# Allegro board A527-REF-DDR4-16X2-S4L-V2-0.brd
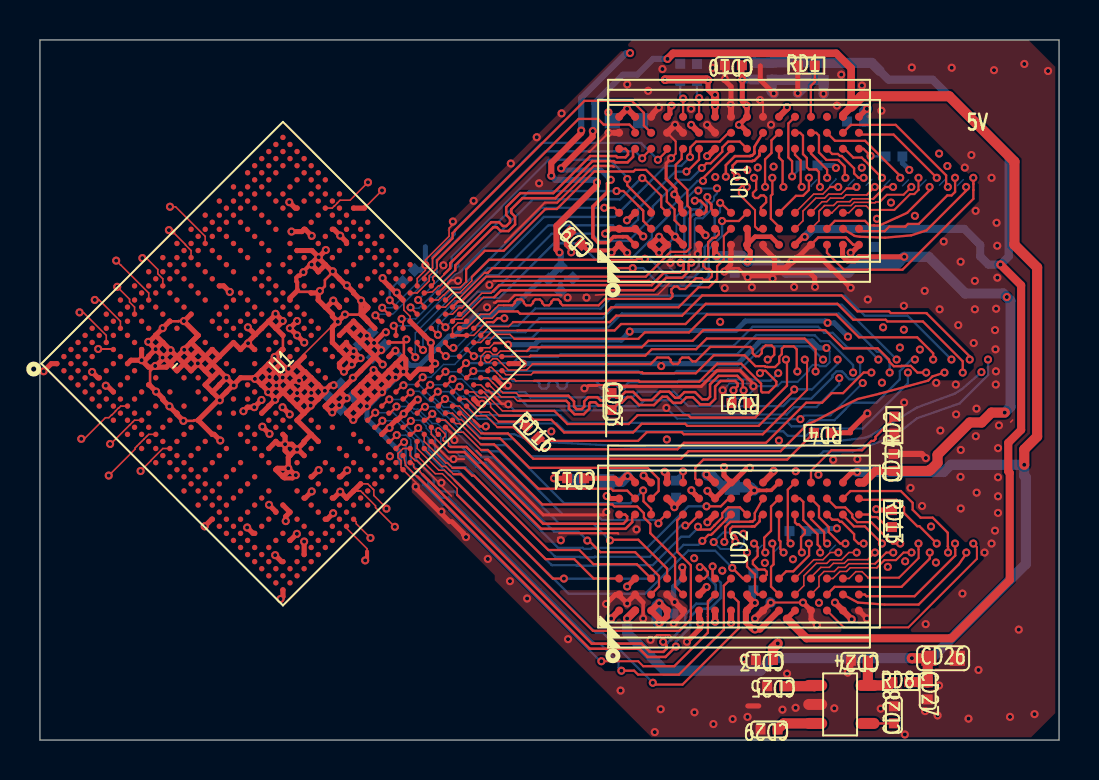
[diagram p0: board, top side]
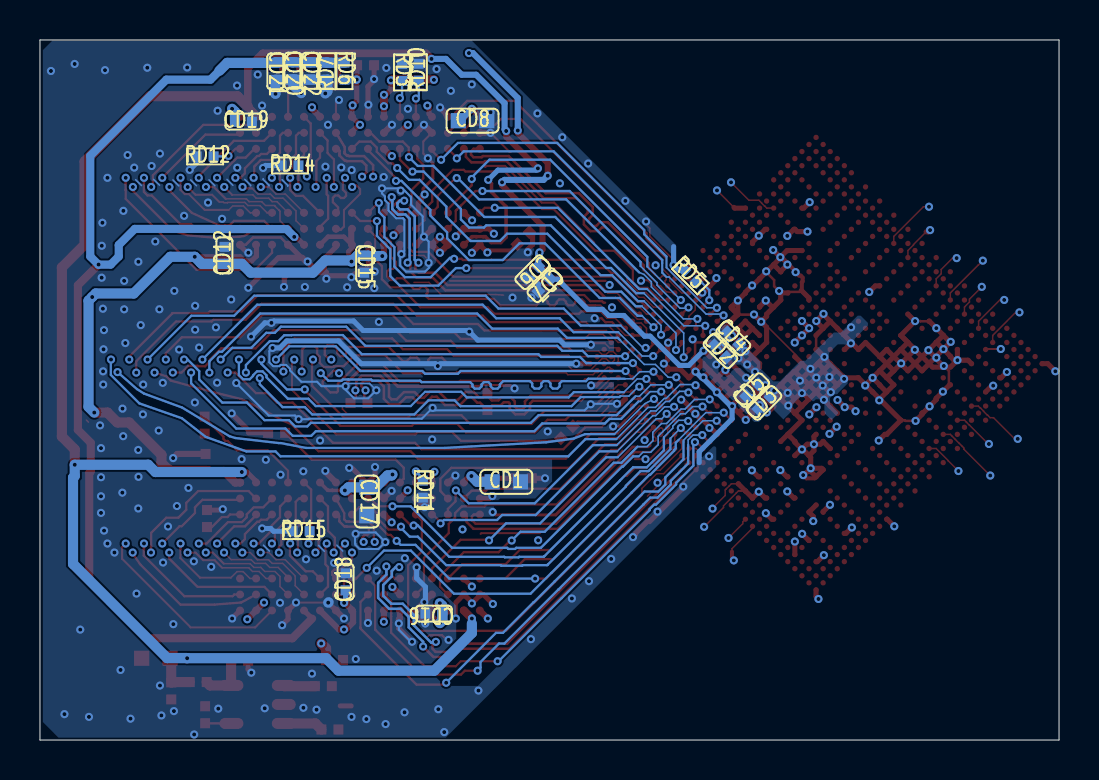
[diagram p1: board, bottom side, seen from below]

Outline 51 x 35 mm; copper layers: TOP, L2GND, L3, BOTTOM. Coordinates in mm from the lower left corner of the outline.
Outline path: 0,35 0,0 51,0 51,35 0,35

## Design rules (mm)
net group SBG1: nets SBG1 SBG1/GND
nets with their own width: min track width 0.102; nets SDQM0

## Placement (name value [footprint] x y rotation side)
CD1  10uF  [C0603]  27.66 12.91 180 bottom
CD2  2.2uF  [C0402]  16.94 19.44 225 bottom
CD3  2.2uF  [C0402]  14.74 16.86 135 bottom
CD4  2.2uF  [C0402]  16.3 20.08 225 bottom
CD5  2.2uF  [C0402]  15.36 17.49 135 bottom
CD6  2.2uF  [C0402]  26.36 23.39 315 bottom
CD7  100nF  [C0402]  25.75 22.74 315 bottom
CD8  10uF  [C0603]  29.35 30.97 180 bottom
CD9  2.2uF  [C0402]  26.8 25.09 135 top
CD10  2.2uF  [C0402]  34.7 33.74 180 top
CD11  4.7uF  [C0402]  26.81 13.09 180 top
CD12  4.7uF  [C0402]  41.76 24.23 90 bottom
CD13  2.2uF  [C0402]  36.25 4 180 top
CD14  2.2uF  [C0402]  42.71 13.88 90 top
CD15  NC/100nF  [C0402]  34.77 23.79 270 bottom
CD16  NC/100nF  [C0402]  31.28 6.32 0 bottom
CD17  10uF  [C0603]  34.64 11.92 270 bottom
CD18  NC/100nF  [C0402]  35.7 7.91 90 bottom
CD19  NC/100nF  [C0402]  40.81 30.92 180 bottom
CD20  100nF  [C0402]  38.36 33.47 270 bottom
CD21  100nF  [C0402]  39.22 33.43 270 bottom
CD22  2.2uF  [C0402]  37.47 33.46 270 bottom
CD23  NC/2.2pF  [C0402]  28.6 16.92 270 top
CD24  1uF  [C0402]  41 3.96 180 top
CD25  1uF  [C0402]  36.81 2.69 180 top
CD26  10uF  [C0603]  45.2 4.09 0 top
CD27  100nF  [C0402]  44.42 2.46 270 top
CD28  22nF  [C0402]  42.73 1.26 90 top
CD29  NC/100nF  [C0402]  36.49 0.53 180 top
NOREF  -  []  51 0 90 top
NOREF#2  -  []  0 35 0 top
RD1  1K  [R0402]  38.35 33.72 0 top
RD2  1K  [R0402]  42.75 15.75 90 top
RD3  240R-1%  [R0402]  32.88 33.38 270 bottom
RD4  240R-1%  [R0402]  39.15 15.36 180 top
RD5  120R-1%  [R0402]  18.45 23.2 225 bottom
RD6  2K-1%  [R0402]  35.76 33.45 270 bottom
RD7  2K-1%  [R0402]  36.61 33.44 90 bottom
RD8  0.01R-1%  [R0402]  43.08 2.9 0 top
RD9  100R  [R0402]  35.03 16.85 180 top
RD10  0R  [R0402]  32.04 33.39 90 bottom
RD11  0R  [R0402]  31.84 12.55 270 bottom
RD12  NC/0R  [R0402]  42.73 29.18 180 bottom
RD13  NC/0R  [R0402]  42.64 11.07 270 top
RD14  0R  [R0402]  38.48 28.73 180 bottom
RD15  0R  [R0402]  37.93 10.45 180 bottom
RD16  NC/0R  [R0402]  24.63 15.39 315 top
U1  A527  [BGA664P50B1700_1700H180]  12.16 18.82 45 top
UD1  DDR4-FBGA96  [BGA96P80B1000_1400H120]  34.98 27.96 90 top
UD2  DDR4-FBGA96  [BGA96P80B1000_1400H120]  34.98 9.68 90 top
UD3  BL9193-2.5BA  [SOT23-5]  40.04 1.78 0 top

## Library data of the parts
CD1-CD29 = C-C0402
RD1-RD15 = R-R0402-1%
RD16 = R-R0402-1%: signal model: R-R0402-1%_R0402_NC/0R_NC/0R
U1 = A527
UD1 UD2 = DDR4-FBGA96
UD3 = RT9050_0

## Footprints (pads in the part's own frame, mm; a bottom-side part is the same pattern mirrored in y, then rotated)
BGA96P80B1000_1400H120
  round 0.4 smd: A1(-3.2,6) A2(-2.4,6) A3(-1.6,6) A7(1.6,6) A8(2.4,6) A9(3.2,6) B1(-3.2,5.2) B2(-2.4,5.2) B3(-1.6,5.2) B7(1.6,5.2) B8(2.4,5.2) B9(3.2,5.2) C1(-3.2,4.4) C2(-2.4,4.4) C3(-1.6,4.4) C7(1.6,4.4) C8(2.4,4.4) C9(3.2,4.4) D1(-3.2,3.6) D2(-2.4,3.6) D3(-1.6,3.6) D7(1.6,3.6) D8(2.4,3.6) D9(3.2,3.6) E1(-3.2,2.8) E2(-2.4,2.8) E3(-1.6,2.8) E7(1.6,2.8) E8(2.4,2.8) E9(3.2,2.8) F1(-3.2,2) F2(-2.4,2) F3(-1.6,2) F7(1.6,2) F8(2.4,2) F9(3.2,2) G1(-3.2,1.2) G2(-2.4,1.2) G3(-1.6,1.2) G7(1.6,1.2) G8(2.4,1.2) G9(3.2,1.2) H1(-3.2,0.4) H2(-2.4,0.4) H3(-1.6,0.4) H7(1.6,0.4) H8(2.4,0.4) H9(3.2,0.4) J1(-3.2,-0.4) J2(-2.4,-0.4) J3(-1.6,-0.4) J7(1.6,-0.4) J8(2.4,-0.4) J9(3.2,-0.4) K1(-3.2,-1.2) K2(-2.4,-1.2) K3(-1.6,-1.2) K7(1.6,-1.2) K8(2.4,-1.2) K9(3.2,-1.2) L1(-3.2,-2) L2(-2.4,-2) L3(-1.6,-2) L7(1.6,-2) L8(2.4,-2) L9(3.2,-2) M1(-3.2,-2.8) M2(-2.4,-2.8) M3(-1.6,-2.8) M7(1.6,-2.8) M8(2.4,-2.8) M9(3.2,-2.8) N1(-3.2,-3.6) N2(-2.4,-3.6) N3(-1.6,-3.6) N7(1.6,-3.6) N8(2.4,-3.6) N9(3.2,-3.6) P1(-3.2,-4.4) P2(-2.4,-4.4) P3(-1.6,-4.4) P7(1.6,-4.4) P8(2.4,-4.4) P9(3.2,-4.4) R1(-3.2,-5.2) R2(-2.4,-5.2) R3(-1.6,-5.2) R7(1.6,-5.2) R8(2.4,-5.2) R9(3.2,-5.2) T1(-3.2,-6) T2(-2.4,-6) T3(-1.6,-6) T7(1.6,-6) T8(2.4,-6) T9(3.2,-6)
BGA664P50B1700_1700H180
  round 0.27 smd: A1(-8,8) A2(-7.5,8) A3(-7,8) A4(-6.5,8) A5(-6,8) A6(-5.5,8) A8(-4.5,8) A10(-3.5,8) A12(-2.5,8) A14(-1.5,8) A16(-0.5,8) A18(0.5,8) A20(1.5,8) A22(2.5,8) A24(3.5,8) A26(4.5,8) A28(5.5,8) A29(6,8) A30(6.5,8) A31(7,8) A32(7.5,8) A33(8,8) AA1(-8,-2) AA2(-7.5,-2) AA3(-7,-2) AA4(-6.5,-2) AA5(-6,-2) AA6(-5.5,-2) AA7(-5,-2) AA9(-4,-2) AA12(-2.5,-2) AA13(-2,-2) AA15(-1,-2) AA16(-0.5,-2) AA18(0.5,-2) AA19(1,-2) AA21(2,-2) AA22(2.5,-2) AA24(3.5,-2) AA26(4.5,-2) AA27(5,-2) AA28(5.5,-2) AA29(6,-2) AA30(6.5,-2) AA31(7,-2) AA32(7.5,-2) AA33(8,-2) AB2(-7.5,-2.5) AB3(-7,-2.5) AB9(-4,-2.5) AB10(-3.5,-2.5) AB11(-3,-2.5) AB12(-2.5,-2.5) AB13(-2,-2.5) AB14(-1.5,-2.5) AB15(-1,-2.5) AB17(0,-2.5) AB24(3.5,-2.5) AB32(7.5,-2.5) AB33(8,-2.5) AC1(-8,-3) AC2(-7.5,-3) AC3(-7,-3) AC4(-6.5,-3) AC5(-6,-3) AC6(-5.5,-3) AC7(-5,-3) AC9(-4,-3) AC15(-1,-3) AC17(0,-3) AC18(0.5,-3) AC19(1,-3) AC20(1.5,-3) AC22(2.5,-3) AC24(3.5,-3) AC26(4.5,-3) AC27(5,-3) AC28(5.5,-3) AC29(6,-3) AC30(6.5,-3) AC31(7,-3) AC32(7.5,-3) AC33(8,-3) AD1(-8,-3.5) AD2(-7.5,-3.5) AD9(-4,-3.5) AD11(-3,-3.5) AD13(-2,-3.5) AD14(-1.5,-3.5) AD15(-1,-3.5) AD20(1.5,-3.5) AD21(2,-3.5) AD22(2.5,-3.5) AD25(4,-3.5) AD32(7.5,-3.5) AD33(8,-3.5) AE1(-8,-4) AE2(-7.5,-4) AE3(-7,-4) AE4(-6.5,-4) AE5(-6,-4) AE6(-5.5,-4) AE7(-5,-4) AE9(-4,-4) AE11(-3,-4) AE12(-2.5,-4) AE13(-2,-4) AE14(-1.5,-4) AE16(-0.5,-4) AE18(0.5,-4) AE19(1,-4) AE20(1.5,-4) AE21(2,-4) AE22(2.5,-4) AE23(3,-4) AE24(3.5,-4) AE25(4,-4) AE26(4.5,-4) AE27(5,-4) AE28(5.5,-4) AE29(6,-4) AE30(6.5,-4) AE31(7,-4) AE32(7.5,-4) AE33(8,-4) AF1(-8,-4.5) AF2(-7.5,-4.5) AF32(7.5,-4.5) AF33(8,-4.5) AG1(-8,-5) AG2(-7.5,-5) AG3(-7,-5) AG4(-6.5,-5) AG5(-6,-5) AG6(-5.5,-5) AG7(-5,-5) AG9(-4,-5) AG11(-3,-5) AG13(-2,-5) AG15(-1,-5) AG17(0,-5) AG19(1,-5) AG21(2,-5) AG23(3,-5) AG25(4,-5) AG28(5.5,-5) AG29(6,-5) AG30(6.5,-5) AG31(7,-5) AG32(7.5,-5) AG33(8,-5) AH1(-8,-5.5) AH2(-7.5,-5.5) AH7(-5,-5.5) AH9(-4,-5.5) AH11(-3,-5.5) AH13(-2,-5.5) AH15(-1,-5.5) AH17(0,-5.5) AH19(1,-5.5) AH21(2,-5.5) AH23(3,-5.5) AH25(4,-5.5) AH27(5,-5.5) AH32(7.5,-5.5) AH33(8,-5.5) AJ1(-8,-6) AJ2(-7.5,-6) AJ3(-7,-6) AJ4(-6.5,-6) AJ5(-6,-6) AJ7(-5,-6) AJ9(-4,-6) AJ11(-3,-6) AJ13(-2,-6) AJ15(-1,-6) AJ17(0,-6) AJ19(1,-6) AJ21(2,-6) AJ23(3,-6) AJ25(4,-6) AJ27(5,-6) AJ30(6.5,-6) AJ31(7,-6) AJ32(7.5,-6) AJ33(8,-6) AK1(-8,-6.5) AK2(-7.5,-6.5) AK5(-6,-6.5) AK7(-5,-6.5) AK9(-4,-6.5) AK11(-3,-6.5) AK13(-2,-6.5) AK15(-1,-6.5) AK17(0,-6.5) AK19(1,-6.5) AK21(2,-6.5) AK23(3,-6.5) AK25(4,-6.5) AK27(5,-6.5) AK29(6,-6.5) AK32(7.5,-6.5) AK33(8,-6.5) AL1(-8,-7) AL2(-7.5,-7) AL3(-7,-7) AL5(-6,-7) AL7(-5,-7) AL9(-4,-7) AL11(-3,-7) AL12(-2.5,-7) AL13(-2,-7) AL14(-1.5,-7) AL15(-1,-7) AL16(-0.5,-7) AL17(0,-7) AL19(1,-7) AL21(2,-7) AL23(3,-7) AL25(4,-7) AL27(5,-7) AL29(6,-7) AL31(7,-7) AL32(7.5,-7) AL33(8,-7) AM1(-8,-7.5) AM2(-7.5,-7.5) AM3(-7,-7.5) AM4(-6.5,-7.5) AM5(-6,-7.5) AM6(-5.5,-7.5) AM7(-5,-7.5) AM8(-4.5,-7.5) AM9(-4,-7.5) AM10(-3.5,-7.5) AM11(-3,-7.5) AM12(-2.5,-7.5) AM13(-2,-7.5) AM14(-1.5,-7.5) AM15(-1,-7.5) AM16(-0.5,-7.5) AM17(0,-7.5) AM18(0.5,-7.5) AM19(1,-7.5) AM20(1.5,-7.5) AM21(2,-7.5) AM22(2.5,-7.5) AM23(3,-7.5) AM24(3.5,-7.5) AM25(4,-7.5) AM26(4.5,-7.5) AM27(5,-7.5) AM28(5.5,-7.5) AM29(6,-7.5) AM30(6.5,-7.5) AM31(7,-7.5) AM32(7.5,-7.5) AM33(8,-7.5) AN1(-8,-8) AN2(-7.5,-8) AN3(-7,-8) AN4(-6.5,-8) AN5(-6,-8) AN6(-5.5,-8) AN7(-5,-8) AN8(-4.5,-8) AN9(-4,-8) AN10(-3.5,-8) AN11(-3,-8) AN13(-2,-8) AN15(-1,-8) AN17(0,-8) AN18(0.5,-8) AN19(1,-8) AN20(1.5,-8) AN21(2,-8) AN22(2.5,-8) AN23(3,-8) AN24(3.5,-8) AN25(4,-8) AN26(4.5,-8) AN27(5,-8) AN28(5.5,-8) AN29(6,-8) AN30(6.5,-8) AN31(7,-8) AN32(7.5,-8) AN33(8,-8) B1(-8,7.5) B2(-7.5,7.5) B3(-7,7.5) B4(-6.5,7.5) B5(-6,7.5) B6(-5.5,7.5) B7(-5,7.5) B8(-4.5,7.5) B9(-4,7.5) B10(-3.5,7.5) B11(-3,7.5) B12(-2.5,7.5) B13(-2,7.5) B14(-1.5,7.5) B15(-1,7.5) B16(-0.5,7.5) B17(0,7.5) B18(0.5,7.5) B19(1,7.5) B20(1.5,7.5) B21(2,7.5) B22(2.5,7.5) B23(3,7.5) B24(3.5,7.5) B25(4,7.5) B26(4.5,7.5) B27(5,7.5) B28(5.5,7.5) B29(6,7.5) B30(6.5,7.5) B31(7,7.5) B32(7.5,7.5) B33(8,7.5) C1(-8,7) C2(-7.5,7) C3(-7,7) C4(-6.5,7) C6(-5.5,7) C7(-5,7) C8(-4.5,7) C9(-4,7) C10(-3.5,7) C11(-3,7) C12(-2.5,7) C13(-2,7) C14(-1.5,7) C15(-1,7) C16(-0.5,7) C17(0,7) C18(0.5,7) C19(1,7) C20(1.5,7) C21(2,7) C22(2.5,7) C23(3,7) C24(3.5,7) C25(4,7) C26(4.5,7) C27(5,7) C28(5.5,7) C29(6,7) C30(6.5,7) C31(7,7) C32(7.5,7) C33(8,7) D1(-8,6.5) D2(-7.5,6.5) D6(-5.5,6.5) D8(-4.5,6.5) D10(-3.5,6.5) D12(-2.5,6.5) D14(-1.5,6.5) D16(-0.5,6.5) D18(0.5,6.5) D20(1.5,6.5) D22(2.5,6.5) D24(3.5,6.5) D26(4.5,6.5) D28(5.5,6.5) D32(7.5,6.5) D33(8,6.5) E1(-8,6) E2(-7.5,6) E3(-7,6) E4(-6.5,6) E5(-6,6) E6(-5.5,6) E8(-4.5,6) E10(-3.5,6) E12(-2.5,6) E14(-1.5,6) E16(-0.5,6) E18(0.5,6) E20(1.5,6) E22(2.5,6) E24(3.5,6) E26(4.5,6) E28(5.5,6) E29(6,6) E30(6.5,6) E31(7,6) E32(7.5,6) E33(8,6) F1(-8,5.5) F2(-7.5,5.5) F6(-5.5,5.5) F8(-4.5,5.5) F10(-3.5,5.5) F12(-2.5,5.5) F14(-1.5,5.5) F16(-0.5,5.5) F18(0.5,5.5) F20(1.5,5.5) F22(2.5,5.5) F24(3.5,5.5) F26(4.5,5.5) F28(5.5,5.5) F32(7.5,5.5) F33(8,5.5) G1(-8,5) G2(-7.5,5) G3(-7,5) G4(-6.5,5) G5(-6,5) G6(-5.5,5) G8(-4.5,5) G10(-3.5,5) G12(-2.5,5) G14(-1.5,5) G16(-0.5,5) G18(0.5,5) G20(1.5,5) G22(2.5,5) G24(3.5,5) G26(4.5,5) G28(5.5,5) G29(6,5) G30(6.5,5) G31(7,5) G32(7.5,5) G33(8,5) H2(-7.5,4.5) H3(-7,4.5) H24(3.5,4.5) H31(7,4.5) H32(7.5,4.5) J1(-8,4) J2(-7.5,4) J3(-7,4) J4(-6.5,4) J5(-6,4) J6(-5.5,4) J7(-5,4) J9(-4,4) J10(-3.5,4) J12(-2.5,4) J13(-2,4) J15(-1,4) J16(-0.5,4) J17(0,4) J18(0.5,4) J19(1,4) J21(2,4) J22(2.5,4) J23(3,4) J26(4.5,4) J28(5.5,4) J29(6,4) J30(6.5,4) J31(7,4) J32(7.5,4) J33(8,4) K2(-7.5,3.5) K3(-7,3.5) K9(-4,3.5) K10(-3.5,3.5) K11(-3,3.5) K12(-2.5,3.5) K13(-2,3.5) K15(-1,3.5) K16(-0.5,3.5) K19(1,3.5) K21(2,3.5) K22(2.5,3.5) K24(3.5,3.5) K25(4,3.5) K26(4.5,3.5) K31(7,3.5) K32(7.5,3.5) L1(-8,3) L2(-7.5,3) L3(-7,3) L4(-6.5,3) L5(-6,3) L6(-5.5,3) L7(-5,3) L9(-4,3) L10(-3.5,3) L12(-2.5,3) L13(-2,3) L15(-1,3) L16(-0.5,3) L17(0,3) L18(0.5,3) L19(1,3) L21(2,3) L22(2.5,3) L24(3.5,3) L26(4.5,3) L27(5,3) L28(5.5,3) L29(6,3) L30(6.5,3) L31(7,3) L32(7.5,3) L33(8,3) M2(-7.5,2.5) M3(-7,2.5) M10(-3.5,2.5) M13(-2,2.5) M16(-0.5,2.5) M18(0.5,2.5) M19(1,2.5) M21(2,2.5) M22(2.5,2.5) M31(7,2.5) M32(7.5,2.5) N1(-8,2) N2(-7.5,2) N3(-7,2) N4(-6.5,2) N5(-6,2) N6(-5.5,2) N7(-5,2) N9(-4,2) N10(-3.5,2) N12(-2.5,2) N13(-2,2) N15(-1,2) N18(0.5,2) N19(1,2) N21(2,2) N22(2.5,2) N24(3.5,2) N26(4.5,2) N27(5,2) N28(5.5,2) N29(6,2) N30(6.5,2) N31(7,2) N32(7.5,2) N33(8,2) P2(-7.5,1.5) P3(-7,1.5) P9(-4,1.5) P11(-3,1.5) P13(-2,1.5) P16(-0.5,1.5) P18(0.5,1.5) P19(1,1.5) P21(2,1.5) P22(2.5,1.5) P24(3.5,1.5) P31(7,1.5) P32(7.5,1.5) R1(-8,1) R2(-7.5,1) R3(-7,1) R4(-6.5,1) R5(-6,1) R6(-5.5,1) R7(-5,1) R11(-3,1) R13(-2,1) R15(-1,1) R17(0,1) R18(0.5,1) R19(1,1) R22(2.5,1) R24(3.5,1) R26(4.5,1) R27(5,1) R28(5.5,1) R29(6,1) R30(6.5,1) R31(7,1) R32(7.5,1) R33(8,1) T2(-7.5,0.5) T3(-7,0.5) T9(-4,0.5) T11(-3,0.5) T13(-2,0.5) T15(-1,0.5) T16(-0.5,0.5) T18(0.5,0.5) T19(1,0.5) T21(2,0.5) T22(2.5,0.5) T24(3.5,0.5) T31(7,0.5) T32(7.5,0.5) U1(-8,0) U2(-7.5,0) U3(-7,0) U4(-6.5,0) U5(-6,0) U6(-5.5,0) U7(-5,0) U8(-4.5,0) U10(-3.5,0) U12(-2.5,0) U13(-2,0) U14(-1.5,0) U16(-0.5,0) U18(0.5,0) U19(1,0) U21(2,0) U22(2.5,0) U25(4,0) U26(4.5,0) U27(5,0) U28(5.5,0) U29(6,0) U30(6.5,0) U31(7,0) U32(7.5,0) U33(8,0) V2(-7.5,-0.5) V3(-7,-0.5) V18(0.5,-0.5) V19(1,-0.5) V31(7,-0.5) V32(7.5,-0.5) W1(-8,-1) W2(-7.5,-1) W3(-7,-1) W4(-6.5,-1) W5(-6,-1) W6(-5.5,-1) W7(-5,-1) W9(-4,-1) W10(-3.5,-1) W12(-2.5,-1) W13(-2,-1) W15(-1,-1) W16(-0.5,-1) W19(1,-1) W21(2,-1) W22(2.5,-1) W23(3,-1) W24(3.5,-1) W25(4,-1) W27(5,-1) W28(5.5,-1) W29(6,-1) W30(6.5,-1) W31(7,-1) W32(7.5,-1) W33(8,-1) Y2(-7.5,-1.5) Y3(-7,-1.5) Y9(-4,-1.5) Y10(-3.5,-1.5) Y12(-2.5,-1.5) Y13(-2,-1.5) Y15(-1,-1.5) Y18(0.5,-1.5) Y19(1,-1.5) Y21(2,-1.5) Y22(2.5,-1.5) Y23(3,-1.5) Y24(3.5,-1.5) Y26(4.5,-1.5) Y31(7,-1.5) Y32(7.5,-1.5)
C0402
  rect 0.5x0.5 smd: 1(-0.425,0) 2(0.425,0)
C0603
  rect 0.76x0.76 smd: 1(-0.71,0) 2(0.71,0)
R0402
  rect 0.5x0.5 smd: 1(-0.425,0) 2(0.425,0)
SOT23-5
  oval 1.2x0.55 smd: 1(-1.246,0.95) 2(-1.246,0) 3(-1.246,-0.95) 4(1.373,-0.95) 5(1.373,0.95)

## Nets
GND: CD1.2 CD2.2 CD3.2 CD4.2 CD5.2 CD6.2 CD7.2 CD8.2 CD9.2 CD10.2 CD11.2 CD12.2 CD13.2 CD14.2 CD15.2 CD16.2 CD17.2 CD18.2 CD19.2 CD20.2 CD21.2 CD22.2 CD24.2 CD25.2 CD26.2 CD27.2 CD28.2 CD29.2 RD1.1 RD2.1 RD3.1 RD4.1 RD5.1 RD7.1 RD10.2 RD11.2 RD12.1 RD13.1 RD14.1 RD15.1 U1.A1(GND0) U1.AA15(GND87) U1.AA16(GND88) U1.AA18(GND89) U1.AA21(GND90) U1.AA22(GND91) U1.AA26(GND92) U1.AA30(GND93) U1.AA32(GND94) U1.AB10(GND95) U1.AB11(GND96) U1.AB12(GND97) U1.AB14(GND98) U1.AB15(GND99) U1.AB17(GND100) U1.AC1(GND101) U1.AC26(GND102) U1.AC29(GND103) U1.AC33(GND104) U1.AD9(GND105) U1.AD11(GND106) U1.AD13(GND107) U1.AD14(GND108) U1.AD20(GND109) U1.AD21(GND110) U1.AD22(GND111) U1.AE9(GND112) U1.AE12(GND113) U1.AE14(GND114) U1.AE18(GND115) U1.AE19(GND116) U1.AE20(GND117) U1.AE21(GND118) U1.AE22(GND119) U1.AE23(GND120) U1.AE24(GND121) U1.AE25(GND122) U1.AE26(GND123) U1.AE29(GND124) U1.AE32(GND125) U1.AG3(GND126) U1.AG6(GND127) U1.AG7(GND128) U1.AG11(GND129) U1.AG25(GND130) U1.AG28(GND131) U1.AG31(GND132) U1.AG33(GND133) U1.AH7(GND134) U1.AH9(GND135) U1.AH27(GND136) U1.AH32(GND137) U1.AJ13(GND138) U1.AJ19(GND139) U1.AJ21(GND140) U1.AJ23(GND141) U1.AK5(GND142) U1.AK11(GND143) U1.AK32(GND144) U1.AL3(GND145) U1.AL9(GND146) U1.AL12(GND147) U1.AL13(GND148) U1.AL14(GND149) U1.AM5(GND150) U1.AM20(GND151) U1.AM26(GND152) U1.AM29(GND153) U1.AN1(GND154) U1.AN10(GND155) U1.AN11(GND156) U1.AN18(GND157) U1.AN22(GND158) U1.AN24(GND159) U1.AN28(GND160) U1.AN31(GND161) U1.AN33(GND162) U1.C6(GND1) U1.C8(GND2) U1.C10(GND3) U1.C12(GND4) U1.C14(GND5) U1.C18(GND6) U1.C20(GND7) U1.D6(GND8) U1.E3(GND9) U1.F6(GND10) U1.F8(GND11) U1.F10(GND12) U1.F12(GND13) U1.G3(GND14) U1.G8(GND15) U1.G10(GND16) U1.G14(GND17) U1.G18(GND18) U1.G29(GND19) U1.J3(GND20) U1.J6(GND21) U1.J9(GND22) U1.J10(GND23) U1.J12(GND24) U1.J13(GND25) U1.J28(GND26) U1.J31(GND27) U1.K9(GND28) U1.K10(GND29) U1.K11(GND30) U1.K12(GND31) U1.K26(GND32) U1.L3(GND33) U1.L6(GND34) U1.L10(GND35) U1.L12(GND36) U1.L13(GND37) U1.L27(GND38) U1.L30(GND39) U1.L33(GND40) U1.M13(GND41) U1.N3(GND42) U1.N6(GND43) U1.N10(GND44) U1.N12(GND45) U1.N15(GND46) U1.N18(GND47) U1.N19(GND48) U1.N22(GND49) U1.N26(GND50) U1.N27(GND51) U1.N30(GND52) U1.P11(GND53) U1.P16(GND54) U1.P19(GND55) U1.P24(GND56) U1.R3(GND57) U1.R7(GND58) U1.R11(GND59) U1.R13(GND60) U1.R19(GND61) U1.R24(GND62) U1.R27(GND63) U1.T15(GND64) U1.T16(GND65) U1.T18(GND66) U1.T24(GND67) U1.U7(GND68) U1.U14(GND69) U1.U16(GND70) U1.U25(GND71) U1.U27(GND72) U1.V18(GND73) U1.V19(GND74) U1.W12(GND75) U1.W13(GND76) U1.W15(GND77) U1.W16(GND78) U1.W22(GND79) U1.W27(GND80) U1.W30(GND81) U1.Y15(GND82) U1.Y18(GND83) U1.Y22(GND84) U1.Y23(GND85) U1.Y26(GND86) UD1.A2(VSSQ1) UD1.A8(VSSQ2) UD1.B2(VSS1) UD1.C9(VSSQ3) UD1.D2(VSSQ4) UD1.D8(VSSQ5) UD1.E1(VSS2) UD1.E3(VSSQ6) UD1.E8(VSSQ7) UD1.F1(VSSQ8) UD1.G8(VSS4) UD1.H1(VSSQ9) UD1.H9(VSSQ10) UD1.K1(VSS5) UD1.K9(VSS6) UD1.N1(VSS8) UD1.T1(VSS9) UD2.A2(VSSQ1) UD2.A8(VSSQ2) UD2.B2(VSS1) UD2.C9(VSSQ3) UD2.D2(VSSQ4) UD2.D8(VSSQ5) UD2.E1(VSS2) UD2.E3(VSSQ6) UD2.E8(VSSQ7) UD2.F1(VSSQ8) UD2.G8(VSS4) UD2.H1(VSSQ9) UD2.H9(VSSQ10) UD2.K1(VSS5) UD2.K9(VSS6) UD2.N1(VSS8) UD2.T1(VSS9) UD3.2(GND)
SBG1/GND: RD14.2 RD15.2 RD16.2 UD1.M9(VSS7) UD2.M9(VSS7)
VCC25-DRAM: CD26.1 CD27.1 RD8.2 UD1.B1(VPP1) UD1.R9(VPP2) UD2.B1(VPP1) UD2.R9(VPP2)
VCC-DRAM: CD1.1 CD2.1 CD3.1 CD4.1 CD5.1 CD8.1 CD9.1 CD10.1 CD11.1 CD12.1 CD13.1 CD14.1 CD15.1 CD16.1 CD17.1 CD18.1 CD19.1 RD6.2 U1.AA24(VCC-DRAM4) U1.AB24(VCC-DRAM5) U1.AC17(VCC-DRAML0) U1.AC18(VCC-DRAML1) U1.AC19(VCC-DRAML2) U1.AC20(VCC-DRAML3) U1.AC22(VCC-DRAML4) U1.AC24(VCC-DRAM6) U1.W23(VCC-DRAM0) U1.W24(VCC-DRAM1) U1.W25(VCC-DRAM2) U1.Y24(VCC-DRAM3) UD1.A1(VDDQ1) UD1.A9(VDDQ2) UD1.B3(VDD1) UD1.B9(VDD2) UD1.C1(VDDQ3) UD1.D1(VDD3) UD1.D9(VDDQ4) UD1.F2(VDDQ5) UD1.F8(VDDQ6) UD1.G1(VDDQ7) UD1.G7(VDD4) UD1.G9(VDDQ8) UD1.J1(VDD5) UD1.J2(VDDQ9) UD1.J8(VDDQ10) UD1.J9(VDD6) UD1.L1(VDD7) UD1.L9(VDD8) UD1.R1(VDD9) UD1.T9(VDD10) UD2.A1(VDDQ1) UD2.A9(VDDQ2) UD2.B3(VDD1) UD2.B9(VDD2) UD2.C1(VDDQ3) UD2.D1(VDD3) UD2.D9(VDDQ4) UD2.F2(VDDQ5) UD2.F8(VDDQ6) UD2.G1(VDDQ7) UD2.G7(VDD4) UD2.G9(VDDQ8) UD2.J1(VDD5) UD2.J2(VDDQ9) UD2.J8(VDDQ10) UD2.J9(VDD6) UD2.L1(VDD7) UD2.L9(VDD8) UD2.R1(VDD9) UD2.T9(VDD10)
VDD18-DRAM: CD6.1 CD7.1 U1.AD25(VDD18-DRAM)
717-BLDO2: CD29.1 UD3.3(EN)
PS: CD25.1 UD3.1(VIN)
SA0: U1.AL31(SA12) UD1.P3(A0) UD2.P3(A0)
SA1: U1.AJ31(SA9) UD1.P7(A1) UD2.P7(A1)
SA2: U1.AK33(SA0) UD1.R3(A2) UD2.R3(A2)
SA3: U1.AL27(SA3) UD1.N7(A3) UD2.N7(A3)
SA4: U1.AH25(SA4) UD1.N3(A4) UD2.N3(A4)
SA5: U1.AJ25(SBA1) UD1.P8(A5) UD2.P8(A5)
SA6: U1.AN26(SBG0) UD1.P2(A6) UD2.P2(A6)
SA7: U1.AJ32(SA11) UD1.R8(A7) UD2.R8(A7)
SA8: U1.AL25(SA8) UD1.R2(A8) UD2.R2(A8)
SA9: U1.AG29(SA10) UD1.R7(A9) UD2.R7(A9)
SA10: U1.AK29(SA13) UD1.M3(A10) UD2.M3(A10)
SA11: U1.AJ33(SA2) UD1.T2(A11) UD2.T2(A11)
SA12: U1.AM33(SA7) UD1.M7(A12) UD2.M7(A12)
SA13: U1.AG30(SA1) UD1.T8(A13) UD2.T8(A13)
SACT: U1.AL29(SACT) UD1.L3(ACT) UD2.L3(ACT)
SBA0: U1.AK25(SBA0) UD1.N2(BA0) UD2.N2(BA0)
SBA1: U1.AK27(SA5) UD1.N8(BA1) UD2.N8(BA1)
SBG0: U1.AN27(SA6) UD1.M2(BG0) UD2.M2(BG0)
SBG1: RD16.1 U1.AM27(SBG1)
SCAS: U1.AM28(SA14) UD1.M8(A15/CAS) UD2.M8(A15/CAS)
SCKE0: U1.AM31(SCKE0) UD1.K2(CKE0) UD2.K2(CKE0)
SCKN: CD23.2 RD9.2 U1.AN30(SCKN) UD1.K8(CK#) UD2.K8(CK#)
SCKP: CD23.1 RD9.1 U1.AM30(SCKP) UD1.K7(CK) UD2.K7(CK)
SCS0: U1.AN32(SCS0) UD1.L7(CS0) UD2.L7(CS0)
SDQ0: U1.AE28(SDQ0) UD1.F7(DQ1)
SDQ1: U1.AE27(SDQ1) UD1.H8(DQ5)
SDQ2: U1.AG32(SDQ2) UD1.G2(DQ0)
SDQ3: U1.AH33(SDQ3) UD1.H2(DQ4)
SDQ4: U1.AE30(SDQ4) UD1.J7(DQ7)
SDQ5: U1.AD32(SDQ5) UD1.J3(DQ6)
SDQ6: U1.AE31(SDQ6) UD1.H7(DQ3)
SDQ7: U1.AD33(SDQ7) UD1.H3(DQ2)
SDQ8: U1.AC27(SDQ8) UD1.A3(DQ8)
SDQ9: U1.AC28(SDQ9) UD1.D3(DQ14)
SDQ10: U1.AC30(SDQ10) UD1.C2(DQ12)
SDQ11: U1.AC31(SDQ11) UD1.C3(DQ10)
SDQ12: U1.AA33(SDQ12) UD1.C8(DQ13)
SDQ13: U1.AA31(SDQ13) UD1.B8(DQ9)
SDQ14: U1.AA28(SDQ14) UD1.D7(DQ15)
SDQ15: U1.AA27(SDQ15) UD1.C7(DQ11)
SDQ16: U1.AM25(SDQ16) UD2.C8(DQ13)
SDQ17: U1.AN25(SDQ17) UD2.B8(DQ9)
SDQ18: U1.AH23(SDQ18) UD2.C7(DQ11)
SDQ19: U1.AK23(SDQ19) UD2.D7(DQ15)
SDQ20: U1.AL23(SDQ20) UD2.D3(DQ14)
SDQ21: U1.AM22(SDQ21) UD2.C3(DQ10)
SDQ22: U1.AN21(SDQ22) UD2.A3(DQ8)
SDQ23: U1.AG21(SDQ23) UD2.C2(DQ12)
SDQ24: U1.AG19(SDQ24) UD2.J3(DQ6)
SDQ25: U1.AH19(SDQ25) UD2.H2(DQ4)
SDQ26: U1.AK19(SDQ26) UD2.H3(DQ2)
SDQ27: U1.AL19(SDQ27) UD2.G2(DQ0)
SDQ28: U1.AM21(SDQ28) UD2.H7(DQ3)
SDQ29: U1.AL21(SDQ29) UD2.J7(DQ7)
SDQ30: U1.AK21(SDQ30) UD2.F7(DQ1)
SDQ31: U1.AH21(SDQ31) UD2.H8(DQ5)
SDQM0: U1.AE33(SDQM0) UD1.E7(DM0)
SDQM1: U1.AC32(SDQM1) UD1.E2(DM1)
SDQM2: U1.AM24(SDQM2) UD2.E2(DM1)
SDQM3: U1.AN20(SDQM3) UD2.E7(DM0)
SDQS0N: U1.AF33(SDQS0N) UD1.F3(DQS0#)
SDQS0P: U1.AF32(SDQS0P) UD1.G3(DQS0)
SDQS1N: U1.AB33(SDQS1N) UD1.A7(DQS1#)
SDQS1P: U1.AB32(SDQS1P) UD1.B7(DQS1)
SDQS2N: U1.AN23(SDQS2N) UD2.A7(DQS1#)
SDQS2P: U1.AM23(SDQS2P) UD2.B7(DQS1)
SDQS3N: U1.AN19(SDQS3N) UD2.F3(DQS0#)
SDQS3P: U1.AM19(SDQS3P) UD2.G3(DQS0)
SODT0: U1.AL32(SODT0) UD1.K3(ODT0) UD2.K3(ODT0)
SRAS: U1.AJ27(SA16) UD1.L8(A16/RAS) UD2.L8(A16/RAS)
SRST: U1.AG23(SRST) UD1.P1(RESET) UD2.P1(RESET)
STEN1: RD1.2 UD1.N9(TEN)
STEN2: RD2.2 UD2.N9(TEN)
SVREF: CD20.1 CD21.1 CD22.1 RD6.1 RD7.2 UD1.M1(VREFCA) UD2.M1(VREFCA)
SWE: U1.AN29(SA15) UD1.L2(A14/WE) UD2.L2(A14/WE)
N186294: RD5.2 U1.AA29(SZQ)
N16294166: RD3.2 UD1.F9(ZQ)
N16294964: RD4.2 UD2.F9(ZQ)
N16326176: CD28.1 UD3.4(BP)
N16326234: CD24.1 RD8.1 UD3.5(VOUT)
N16549943: RD10.1 UD1.E9(VSS3)
N16549961: RD11.1 UD2.E9(VSS3)
N16550688: RD12.2 UD1.T7(NC)
N16550696: RD13.2 UD2.T7(NC)

Pads without a net: U1 A2 A3 A4 A5 A6 A8 A10 A12 A14 A16 A18 A20 A22 A24 A26 A28 A29 A30 A31 A32 A33 AA1 AA2 AA3 AA4 AA5 AA6 AA7 AA9 AA12 AA13 AA19 AB2 AB3 AB9 AB13 AC2 AC3 AC4 AC5 AC6 AC7 AC9 AC15 AD1 AD2 AD15 AE1 AE2 AE3 AE4 AE5 AE6 AE7 AE11 AE13 AE16 AF1 AF2 AG1 AG2 AG4 AG5 AG9 AG13 AG15 AG17 AH1 AH2 AH11 AH13 AH15 AH17 AJ1 AJ2 AJ3 AJ4 AJ5 AJ7 AJ9 AJ11 AJ15 AJ17 AJ30 AK1 AK2 AK7 AK9 AK13 AK15 AK17 AL1 AL2 AL5 AL7 AL11 AL15 AL16 AL17 AL33 AM1 AM2 AM3 AM4 AM6 AM7 AM8 AM9 AM10 AM11 AM12 AM13 AM14 AM15 AM16 AM17 AM18 AM32 AN2 AN3 AN4 AN5 AN6 AN7 AN8 AN9 AN13 AN15 AN17 B1 B2 B3 B4 B5 B6 B7 B8 B9 B10 B11 B12 B13 B14 B15 B16 B17 B18 B19 B20 B21 B22 B23 B24 B25 B26 B27 B28 B29 B30 B31 B32 B33 C1 C2 C3 C4 C7 C9 C11 C13 C15 C16 C17 C19 C21 C22 C23 C24 C25 C26 C27 C28 C29 C30 C31 C32 C33 D1 D2 D8 D10 D12 D14 D16 D18 D20 D22 D24 D26 D28 D32 D33 E1 E2 E4 E5 E6 E8 E10 E12 E14 E16 E18 E20 E22 E24 E26 E28 E29 E30 E31 E32 E33 F1 F2 F14 F16 F18 F20 F22 F24 F26 F28 F32 F33 G1 G2 G4 G5 G6 G12 G16 G20 G22 G24 G26 G28 G30 G31 G32 G33 H2 H3 H24 H31 H32 J1 J2 J4 J5 J7 J15 J16 J17 J18 J19 J21 J22 J23 J26 J29 J30 J32 J33 K2 K3 K13 K15 K16 K19 K21 K22 K24 K25 K31 K32 L1 L2 L4 L5 L7 L9 L15 L16 L17 L18 L19 L21 L22 L24 L26 L28 L29 L31 L32 M2 M3 M10 M16 M18 M19 M21 M22 M31 M32 N1 N2 N4 N5 N7 N9 N13 N21 N24 N28 N29 N31 N32 N33 P2 P3 P9 P13 P18 P21 P22 P31 P32 R1 R2 R4 R5 R6 R15 R17 R18 R22 R26 R28 R29 R30 R31 R32 R33 T2 T3 T9 T11 T13 T19 T21 T22 T31 T32 U1 U2 U3 U4 U5 U6 U8 U10 U12 U13 U18 U19 U21 U22 U26 U28 U29 U30 U31 U32 U33 V2 V3 V31 V32 W1 W2 W3 W4 W5 W6 W7 W9 W10 W19 W21 W28 W29 W31 W32 W33 Y2 Y3 Y9 Y10 Y12 Y13 Y19 Y21 Y31 Y32; UD1 P9 T3; UD2 P9 T3

## Via types
v1: diameter 0.406, hole 0.203, TOP to BOTTOM, 565 vias

## Routing (per net, layer and track width the routed paths; a pad name or vN(x,y) marks a point on that pad's centre or on a via; arc(x,y) is an arc through that point)
GND: length 856.7
  TOP w0.076: U1.AA32 18.88,23.08 19.29,23.49 v1(19.29,23.75) 19.29,24 20.47,25.19 20.47,25.59 20.65,25.77 ; U1.AE32 20.64,21.29 20.96,21.61 21.12,21.61 21.29,21.79 ; v1(16.41,27.89) 15.52,26.99 15.02,26.99 14.88,26.86 14.88,26.85 14.74,26.7 14.73,26.7 14.62,26.6 U1.J31 ; 22.73,19.85 22.5,19.61 22.14,19.61 U1.AK32 ; U1.AN11 15.83,10.91 15.83,10.82 v1(16.54,10.1) ; 31.61,5.15 31.5,5.26 30.9,5.26 30.87,5.23 ; U1.C20 8.27,25.18 6.79,26.66 v1(6.51,26.66) ; 16.37,9.42 16.37,9.57 15.34,10.59 U1.AN10 ; U1.C12 5.44,22.35 4.05,23.75 4.04,23.75 v1(3.81,23.97) ; 27.8,22.25 28.18,22.27 30.92,22.27 31.53,22.88 32.28,22.88 ; v1(3.87,22.66) 4.48,22.04 4.48,21.9 4.73,21.65 U1.C10 ; v1(3.51,14.8) 3.54,14.8 4.48,15.74 4.48,15.74 4.63,15.89 4.63,15.89 4.73,15.99 U1.L3 ; 20.6,12.2 20.09,12.7 v1(20.09,12.86) 19.97,12.86 18.86,13.97 18.77,13.97 18.52,14.22 U1.AM20 18.17,14.58 17.92,14.33 17.92,14.12 18.07,13.97 18.07,13.62 U1.AN18 18.8,12.88 v1(18.8,12.67) 18.88,12.6 ; 35.86,16.69 35.86,16.55 35.64,16.34 ; v1(2.07,15.06) 2.22,15.06 3.28,16.12 3.45,16.12 3.57,16.24 3.58,16.24 3.78,16.43 3.78,16.45 3.92,16.59 3.94,16.59 4.04,16.7 U1.J3 ; U1.AL14 16.4,12.81 16.51,12.71 16.71,12.5 16.71,12.23 17.34,11.59 v1(17.34,11.57) ; 31.66,24.1 31.78,24.23 32.5,24.23 32.55,24.28 ; U1.C6 3.32,20.23 2.19,21.37 2,21.37 v1(1.98,21.38) ; 15.94,12.46 16.05,12.46 16.15,12.35 16.79,11.71 16.79,11.62 17.76,10.66 ; U1.AM29 22.06,17.76 22.34,17.48 22.45,17.48 22.61,17.31 ; v1(5.03,13.45) 5.54,13.96 5.54,13.97 6.15,14.58 U1.R3 ; U1.C14 6.15,22.71 6.15,23.06 5.9,23.31 5.9,23.53 5.33,24.1 v1(5.12,24.1) ; U1.AA30 18.21,21.96 18.21,21.5 18.52,21.18 U1.AC29 ; U1.AH32 21.7,20.23 22.3,20.83 ; 14.63,20.64 14.56,20.64 13.22,19.3 U1.V19 ; 20.64,20.23 20.64,20.59 20.91,20.85 21.26,20.85 U1.AG33 ; 6.65,25.41 7.28,24.78 7.28,24.76 7.56,24.48 U1.C18 ; U1.N3 5.44,15.28 5.34,15.18 5.34,15.18 5.19,15.03 4.98,14.83 4.76,14.6 4.76,14.54 v1(3.44,13.22) ; v1(2.74,22.01) 2.96,22.01 4.03,20.94 U1.C8 ; 48.67,16 48.57,15.9 ; U1.AM26 21,16.7 21.72,15.98 21.72,15.98 ; 16.27,26.64 v1(17.12,27.48)
  TOP w0.102: 20.91,22.97 v1(20.92,22.97) 20.92,22.95 20.88,22.99 20.57,22.99 U1.AC33 ; v1(28.45,30.36) 27.5,29.42 27.45,29.42 ; v1(38.18,6.88) 36.58,6.88 v1(36.57,6.87) ; 25.98,10.34 28.91,10.34 28.94,10.31 ; 13.55,12.43 v1(13.6,12.43) ; 30.48,22.96 23.48,22.96 ; v1(26.06,9.99) 26.06,10.06 26.01,10.12 25.93,10.12 ; 27.88,17.73 27.91,17.75 28.94,17.75 29.01,17.68 ; UD1.D8 31.81,29.93 31.81,29.32 v1(31.59,29.09) ; 28.73,28.67 28.7,28.67 28.65,28.71 27.72,28.71 25.89,26.87 25.26,26.87 23.26,24.87 ; 22.08,14.23 21.84,14.46 21.84,14.46 ; v1(36.03,32.01) 36.18,31.86 UD1.K9 ; 30.76,5.13 30.87,5.24 31.05,5.24 31.05,5.24 31.32,5.24 31.32,5.24 31.42,5.24 31.44,5.22 ; U1.AL13 15.94,12.46 ; U1.D6 3.65,19.55 v1(2.91,19.55) ; 21.23,14.04 v1(20.69,14.04) 20.47,14.04 U1.AN22 ; 20.11,23.66 v1(20.19,23.74) ; U1.F10 5.47,19.91 ; 27.22,22.25 v1(27.35,22.12)
  TOP w0.114: 22.66,20.9 22.37,20.9 22.3,20.83 ; 22.69,22.96 23.48,22.96 23.48,22.96 ; v1(23.24,21.09) 22.89,21.09 22.7,20.9 ; 17.76,10.66 v1(17.76,10.66) ; 26.09,22.25 23.76,22.25 23.45,21.94 22.87,21.94 22.79,21.87 22.72,21.87 ; 22.27,14.03 22.41,14.03
  TOP w0.127: 17.46,19.88 18.18,19.88 18.21,19.91 ; U1.AE26 18.21,19.21 18.21,19.91 ; 22.7,20.9 22.66,20.9 ; v1(23.44,16.79) 23.44,16.81 23.11,16.81 22.61,17.31 ; v1(34.25,23.42) 34.42,23.58 34.7,23.58 34.71,23.59 34.96,23.59 35.23,23.33 ; UD1.N1 38.95,25.13 40.33,25.13 40.7,24.76 UD1.T1 ; 18.21,19.91 v1(18.33,20.03) ; v1(23.43,19.76) 23.34,19.85 22.73,19.85 ; v1(7.2,20.95) 6.93,20.95 6.93,20.94 6.5,20.94 U1.F12 ; v1(7.18,15.96) 7.69,15.96 7.72,15.99 7.92,15.99 ; 21.72,15.98 22.01,15.68 v1(22.31,15.68) ; v1(15.26,21.28) 15.27,21.27 16.07,21.27 ; U1.J6 5.51,17.83 5.51,18.45 v1(5.76,18.7) ; U1.AN24 20.74,15.18 20.74,15 v1(20.74,15) ; U1.T18 U1.R19 ; 20.64,20.23 U1.AH32 ; 12.89,22.48 12.97,22.41 13.52,22.41 U1.P24 ; v1(14.01,22.45) 14.01,22.46 14.02,22.46 14.26,22.69 14.26,23 14.65,23.4
  TOP w0.152: 29.01,17.68 33.09,17.68 33.88,18.47 35.04,18.47 35.7,17.81 v1(35.7,17.69) ; v1(31.75,27.28) 31.82,27.36 31.82,27.58 31.33,28.06 31.33,28.84 v1(31.59,29.09) ; 27.88,17.73 27.46,17.73 27.31,17.58 v1(27.25,17.58) ; v1(28.34,11.4) 28.2,11.26 25.19,11.26 22.41,14.03
  TOP w0.178: v1(30.18,6.07) 30.18,6.88
  TOP w0.203: UD2.E1 32.18,6.29 v1(31.71,5.82) ; 16.37,9.42 16.37,9.07 v1(16.27,8.98) ; 12.89,22.48 12.87,22.5 12.87,22.89 12.83,22.93 12.83,23.13 12.93,23.22 13.01,23.22 v1(13.18,23.39) 13.18,23.43 13.5,23.75 ; v1(23.42,17.73) 23.15,17.73 U1.AN31 ; v1(12.8,13.25) 12.64,13.08 12.24,13.08 U1.AE9
  TOP w0.254: v1(15.69,19.44) 15.34,19.8 U1.Y23 U1.Y22 ; v1(15.69,19.44) 15.61,19.44 U1.AA22 ; v1(15.69,19.44) v1(16.04,19.09) 15.99,19.05 15.88,19.05 v1(15.61,18.78) ; 20.49,10.92 18.9,12.51 18.9,12.54 18.8,12.63 v1(18.8,12.67) ; v1(12.26,14.79) 12.26,15.18 U1.AB12 ; v1(12.26,14.79) 11.94,14.79 U1.AB11 U1.AB10 ; v1(12.26,14.79) 12.26,14.47 U1.AD11 ; v1(12.26,14.79) 12.61,14.79 v1(12.87,14.53) ; v1(13.95,24.14) 13.61,24.48 U1.L27 12.87,24.48 U1.K26 ; v1(13.95,24.14) v1(14.31,24.5) ; v1(13.95,24.14) 13.95,24.1 14.28,23.77 14.61,23.44 v1(14.65,23.44) 14.65,23.4 U1.R27 15.32,22.73 v1(15.36,22.73) 15.69,22.39 U1.U27 v1(16.07,21.98) ; v1(13.95,24.14) 13.91,24.14 13.59,23.83 v1(13.59,23.77) ; U1.Y22 U1.W22 14.63,20.64 v1(14.9,20.91) ; U1.Y22 U1.AA22 ; U1.AE14 U1.AD14 ; U1.AD14 U1.AB14 U1.AB15 ; U1.AD14 U1.AD13 13.22,14.88 v1(12.87,14.53) ; UD2.H9 UD2.G8 v1(33.4,12.46) ; UD2.H9 34.23,13.23 v1(34.23,13.65) ; UD2.H9 34.66,12.88 35.39,13.61 v1(35.52,13.61) ; v1(26.58,24.39) 26.58,24.53 26.34,24.77 26.34,25.23 CD9.2 ; U1.AE22 U1.AD22 ; U1.AE22 v1(17.12,17.39) ; U1.AE22 U1.AE21 ; U1.AE22 U1.AE23 ; U1.AD22 16.66,18.38 16.66,18.47 v1(16.7,18.5) 16.7,18.52 U1.AE23 ; U1.AD22 U1.AD21 ; U1.AC29 U1.AE29 19.54,19.93 19.54,19.87 v1(19.56,19.87) 19.58,19.84 U1.AG28 19.58,19.02 v1(19.78,18.82) 19.58,18.63 U1.AH27 19.5,18.54 18.95,18.54 U1.AG25 18.21,18.42 v1(18.19,18.42) ; 17.45,17.77 17.45,17.79 v1(17.8,18.13) ; 17.45,17.77 U1.AE23 ; 17.45,17.77 17.45,17.75 17.38,17.75 17.12,17.49 v1(17.12,17.39) ; 6.18,19.12 v1(6.14,19.12) 6.14,19.19 v1(5.79,19.54) ; 6.18,19.12 6.53,19.48 ; 6.18,19.12 6.21,19.12 ; U1.L13 8.62,19.53 ; U1.L13 U1.L12 ; U1.L13 8.62,19.53 ; 8.62,19.53 U1.M13 ; 12.15,19.53 11.81,19.19 11.81,19.18 U1.T16 ; 12.15,19.53 U1.T18 ; 12.15,19.53 12.12,19.53 v1(11.74,19.15) 12.06,18.83 ; UD2.N1 v1(38.18,6.88) ; UD2.N1 38.58,6.04 v1(38.88,5.74) ; UD2.N1 38.6,6.48 ; U1.AE23 17.46,18.47 ; v1(15.37,13.48) 15.05,13.16 U1.AJ13 ; v1(40.42,3.37) 40.58,3.53 CD24.2 ; U1.AE20 U1.AD20 U1.AD21 ; U1.AE20 U1.AE21 ; U1.AE20 U1.AE19 ; U1.AE20 16.36,16.74 ; v1(10.41,19.84) 10.41,19.91 10.77,20.27 ; v1(10.41,19.84) 10.35,19.84 U1.N15 9.68,19.88 U1.M13 ; v1(10.41,19.84) 10.73,19.53 U1.P16 ; v1(24.16,18.82) 24.16,18.82 U1.AN33 ; v1(13.55,16.72) U1.AA16 ; v1(13.55,16.72) 13.55,16.67 U1.AB15 ; v1(13.55,16.72) 13.6,16.72 U1.AB17 ; U1.AA16 U1.AA15 ; U1.AA16 12.9,17.37 12.9,17.38 ; U1.AA16 13.55,17.38 13.62,17.38 ; 13.22,18.43 12.87,18.78 U1.V18 ; 13.22,18.43 12.96,18.17 v1(12.96,17.97) ; 13.22,18.43 13.26,18.43 U1.Y18 ; 6.65,25.41 6.54,25.41 v1(6.45,25.5) ; U1.AG11 13.61,13.16 v1(13.95,13.5) ; v1(12.87,14.53) 12.91,14.49 12.96,14.49 U1.AE12 ; v1(12.87,14.53) 12.82,14.49 12.77,14.49 U1.AD11 ; U1.L12 U1.K12 ; U1.L12 8.62,18.82 ; U1.L12 7.92,18.82 ; U1.K12 U1.J12 ; U1.K12 7.58,19.19 7.54,19.19 ; 7.92,18.82 v1(7.9,18.83) U1.K11 7.54,19.19 ; 7.92,18.82 8.27,18.47 8.27,18.46 ; 7.92,18.82 U1.L10 U1.K10 ; U1.AE21 16.73,17.07 16.74,17.07 ; U1.AE21 U1.AD21 ; U1.P19 12.15,20.93 v1(12.15,20.95) v1(11.79,21.31) 11.79,21.28 U1.N19 ; U1.P19 U1.N19 ; U1.P19 U1.R19 ; v1(5.76,18.7) 5.76,18.67 5.74,18.65 5.43,18.65 v1(5.09,18.99) ; v1(5.76,18.7) 5.8,18.74 5.83,18.74 6.21,19.12 ; v1(5.76,18.7) 5.84,18.7 5.89,18.65 6.33,18.65 U1.J9 ; U1.G10 6.12,19.88 v1(5.79,19.54) ; U1.G10 v1(6.53,19.49) ; U1.G10 U1.F10 ; U1.J12 U1.J13 7.92,20.23 ; U1.J12 7.21,19.53 7.54,19.19 7.54,19.19 ; U1.J12 7.92,20.23 ; 20.61,10.92 21.19,10.34 21.19,10.27 v1(21.32,10.15) ; v1(5.09,18.99) 5.08,18.99 4.55,18.99 U1.F6 ; v1(5.09,18.99) 5.09,19.52 U1.F8 ; v1(5.09,18.99) 5.26,18.99 U1.G8 5.44,19.2 v1(5.79,19.54) ; v1(8.24,10.69) 8.6,11.04 U1.AC1 ; v1(31.75,27.28) 31.91,27.12 31.91,26.99 32.06,26.84 32.06,26.48 UD1.E3 ; v1(11.77,9.24) 12.09,8.92 U1.AL3 ; v1(9.5,22.41) 9.2,22.71 U1.G18 ; v1(31.78,25.16) UD1.D2 ; 16.74,17.07 16.4,16.74 16.36,16.74 ; 16.74,17.07 17.06,17.39 v1(17.12,17.39) ; v1(41.85,11.54) 41.89,11.5 RD13.1 ; U1.U16 U1.T16 ; U1.U16 v1(11.49,18.15) ; U1.U16 v1(12.15,18.12) 12.17,18.1 12.18,18.1 ; U1.U16 11.8,18.58 12.06,18.83 ; U1.T16 11.1,18.47 ; v1(11.49,18.15) 11.18,18.47 11.1,18.47 ; v1(11.49,18.15) 11.53,18.11 11.53,18.03 11.85,17.71 U1.W15 ; v1(11.49,18.15) 11.1,17.76 ; v1(40.57,24.37) 40.62,24.37 40.98,24.73 UD1.T1 ; U1.G29 12.77,26.6 v1(12.48,26.89) ; 11.78,17.03 11.78,17.06 11.46,17.38 ; 11.78,17.03 v1(11.77,17.01) U1.W13 11.1,16.34 ; 11.78,17.03 U1.W15 ; U1.M13 8.62,18.82 ; v1(2.61,18.4) 2.9,18.11 U1.E3 ; 11.1,18.47 10.76,18.12 v1(10.76,18.06) ; 13.93,22.37 v1(14.01,22.45) 13.95,22.39 13.93,22.37 ; 13.93,22.37 U1.R24 U1.T24 ; 13.93,22.37 13.91,22.35 U1.P24 ; v1(13.22,19.87) v1(12.87,20.23) v1(12.51,20.59) v1(12.87,20.95) ; v1(14.26,17.47) 14.22,17.47 U1.AA18 ; v1(14.26,17.47) 14.26,17.38 U1.AB17 ; v1(14.26,17.47) 14.53,17.74 v1(14.7,17.74) ; U1.N12 8.62,18.11 8.62,18.11 ; U1.N12 8.62,18.82 ; U1.N12 v1(9.33,18.11) ; v1(12.96,17.97) 12.44,18.49 v1(12.44,18.56) ; v1(12.96,17.97) 13.14,17.8 13.26,17.8 ; v1(12.96,17.97) 12.95,17.95 12.7,17.95 U1.W16 ; U1.AA15 U1.Y15 ; U1.AA15 U1.AB15 ; v1(28.45,30.36) 28.74,30.36 ; 8.63,17.4 U1.N10 8.62,18.11 ; 8.63,17.4 8.98,17.74 U1.P11 v1(9.33,18.11) ; 8.63,17.4 9,17.03 9,17 9.01,17 9,16.98 8.98,16.98 8.98,16.98 8.9,16.98 7.92,15.99 ; U1.AE25 U1.AE26 18.31,19.03 18.31,18.54 v1(18.19,18.42) ; U1.AE25 17.46,18.47 ; U1.AE25 18.11,18.53 18.19,18.53 v1(18.19,18.42) ; 16.06,16.39 v1(16.36,16.69) 16.36,16.74 ; 16.06,16.39 v1(15.68,16.01) U1.AE18 U1.AE19 ; 16.06,16.39 16,16.39 U1.AE19 ; v1(31.75,11.64) UD2.E8 ; U1.Y15 U1.W15 ; U1.Y15 12.84,17.38 12.9,17.38 ; U1.N27 U1.N26 13.93,23.44 v1(13.59,23.77) ; 12.18,18.1 11.85,17.77 11.85,17.75 v1(11.83,17.73) 11.82,17.71 11.8,17.71 11.46,17.38 ; 12.18,18.1 12.18,18.09 U1.W16 ; 12.18,18.1 12.54,18.46 ; 6.54,19.48 U1.J10 ; 6.54,19.48 v1(6.53,19.49) ; 6.53,19.48 v1(6.53,19.49) ; U1.J10 U1.J9 ; U1.J10 U1.K10 ; U1.J10 6.88,19.17 v1(7.22,19.51) ; U1.J9 U1.K9 U1.K10 ; U1.J9 6.5,18.83 6.21,19.12 ; v1(10.41,20.64) 10.77,20.27 10.77,20.27 ; 11.46,17.38 11.43,17.38 v1(11.42,17.39) 11.42,17.44 11.1,17.76 ; 13.26,17.8 13.26,17.74 ; 13.26,17.8 U1.Y18 ; 13.26,17.74 12.9,17.38 ; 13.26,17.74 13.62,17.38 ; v1(9.7,17.73) 9.65,17.73 U1.R11 9,17.07 v1(9,16.99) ; 7.92,20.23 v1(7.2,20.95) 7.22,20.95 U1.G14 ; v1(31.76,6.9) UD2.D2 ; U1.AD11 12.43,14.14 v1(12.43,13.59) ; v1(32.14,8.64) 32.14,8.56 32.18,8.53 UD2.E3 ; U1.AA18 13.62,17.45 13.62,17.38 ; U1.AA18 U1.Y18 ; v1(12.43,13.59) 11.88,13.59 U1.AD9 U1.AE9 12.43,13.43 v1(12.43,13.59) ; v1(12.43,13.59) 12.77,13.25 v1(12.8,13.25) ; 36.18,6.48 UD2.K1 36.57,6.86 v1(36.57,6.87) ; v1(18.19,18.42) 17.9,18.13 v1(17.8,18.13) ; v1(17.8,18.13) 17.46,18.47 ; U1.T24 14.35,21.65 v1(14.68,21.98) 14.99,21.66 U1.U25 ; U1.T24 14.63,21.29 14.63,21.19 v1(14.9,20.91) ; U1.N19 U1.N18 10.78,20.27 10.77,20.27 ; U1.L30 14.71,25.54 v1(15.02,25.22) 15.34,24.9 U1.N30 ; v1(15.61,18.78) 15.61,18.91 U1.AA22 ; v1(15.61,18.78) 15.57,18.78 v1(15.21,18.42) 14.99,18.64 U1.AA21 U1.AA22 ; v1(41.4,16.33) 40.55,15.48 40.55,15.36 39.58,15.36 RD4.1 ; U1.AG3 10.66,10.33 v1(10.37,10.63) ; v1(11.46,11.76) 11.8,11.42 U1.AG6 ; 8.27,18.46 8.62,18.82 ; 8.27,18.46 8.62,18.11 ; 35.42,1.7 35.97,1.7 ; U1.K10 7.54,19.15 7.54,19.19 ; U1.W27 16.4,21.6 16.07,21.27 ; U1.W27 v1(16.07,21.98) ; U1.W27 16.07,21.32 ; v1(32.91,24.3) 32.98,24.37 UD1.F1 ; U1.AK11 14.71,12.1 v1(15.02,12.42) U1.AL12 U1.AL13 U1.AL14 ; UD1.C9 30.68,31.26 30.68,31.34 ; 13.55,12.43 v1(13.6,12.43) 13.27,12.1 U1.AH9 ; v1(10.76,18.06) 10.8,18.06 11.1,17.76 ; v1(10.76,18.06) 10.7,18.11 U1.R13 9.68,17.76 v1(9.33,18.11) ; 12.9,17.38 12.52,17.76 U1.W16 ; U1.W15 U1.W16 ; 12.54,18.46 12.54,18.49 U1.V19 ; 12.54,18.46 v1(12.44,18.56) ; U1.AG7 U1.AH7 12.3,11.18 v1(12.3,10.95) ; U1.AA26 U1.Y26 ; U1.Y26 16.07,21.27 ; U1.Y26 16.4,20.99 16.07,21.32 ; v1(40.57,22.61) 39.07,24.11 38.96,24.11 ; U1.AB17 13.62,17.36 13.62,17.38 ; v1(13.59,23.77) 13.52,23.77 13.5,23.75 ; U1.F12 6.49,20.94 v1(6.14,20.59) 5.79,20.25 U1.F10 ; 7.54,19.19 7.54,19.19 ; 35.34,23.21 36.58,23.21 36.76,23.4 ; 35.34,23.21 35.23,23.33 ; 35.34,23.21 v1(35.41,23.14) ; v1(5.79,19.54) v1(5.42,19.91) 5.47,19.91 U1.F10 ; U1.L33 16.23,26.6 16.27,26.64 ; 36.05,33.71 36.05,33 v1(36.72,32.33) ; 16.07,21.32 16.07,21.27 ; 16.07,21.32 v1(16.07,21.98) ; 36.66,23.39 v1(36.66,23.07) ; 36.66,23.39 36.76,23.48 36.76,24.08 36.18,24.66 UD1.K1 ; 36.66,23.39 36.76,23.39 36.76,23.4 ; v1(13.6,25.21) 13.27,25.54 U1.J28 13.11,25.42 v1(12.59,25.42) ; v1(33.04,5.83) 33.04,5.57 v1(32.38,4.91) ; v1(30.19,25.18) 29.81,25.56 UD1.B2 29.74,25.52 29.02,25.52 UD1.A2 28.53,25.56 v1(28.28,25.32) ; U1.AN1 12.16,7.17 v1(12.04,7.05) ; U1.AK5 12.53,9.98 v1(12.86,10.31) ; 12.89,22.48 12.51,22.1 U1.N22 ; v1(14.9,20.91) 14.9,20.92 v1(15.26,21.28) ; 36.76,23.4 36.95,23.59 ; 36.76,23.4 36.8,23.36 38.52,23.36 38.77,23.11 38.77,22.67 v1(38.78,22.66) ; v1(28.33,6.8) 28.8,7.28 UD2.A2 28.98,7.23 v1(29.38,6.83) 29.38,6.88 29.78,7.28 UD2.B2 30.18,6.88 ; UD1.H1 34.58,24.23 34.56,24.21 34.56,23.77 34.27,23.48 v1(34.25,23.42) ; v1(34.56,31.77) 34.58,31.79 34.58,32.67 34.28,32.98 v1(34.28,33.05) CD10.2 ; U1.R7 U1.U7 8.72,15.28 v1(9.02,14.98) ; 12.06,18.83 12.34,18.56 v1(12.44,18.56) ; U1.AN28 21.94,16.81 v1(22.12,16.81) ; U1.A1 0.56,18.82 v1(0.18,18.44) ; v1(28.36,12.2) 28.36,12.15 28.43,12.15 28.5,12.08 UD2.A8 ; U1.AA30 17.85,22.32 v1(17.85,22.37) 17.83,22.39 17.78,22.39 17.15,23.02 v1(17.15,23.1) ; v1(12.14,16.64) v1(12.5,16.28) ; v1(11.13,15.67) v1(11.49,15.31) ; v1(18.91,17.02) 18.84,17.02 U1.AJ23 18.52,16.64 v1(18.2,16.31) 17.88,15.99 U1.AJ21 17.49,15.67 v1(17.49,15.61) 17.43,15.61 U1.AJ19 ; U1.AM5 v1(13.22,9.92) ; U1.AL9 14.37,11.04 v1(14.67,11.34) ; v1(41.38,6.08) UD2.T1 ; U1.J6 5.47,17.76 v1(5.81,17.42) 6.15,17.09 U1.L6 6.15,17.01 v1(6.48,16.68) 6.82,16.34 U1.N6 6.85,16.28 v1(7.18,15.96) ; v1(25.72,13.09) CD11.2 ; 37.91,24.11 38.56,24.76 UD1.N1 ; UD2.C9 30.55,12.88 v1(30.21,13.22) ; v1(37.92,32.35) RD1.1 ; v1(11.08,17) v1(10.73,16.64) 10.38,16.64 v1(10.18,16.44) ; U1.G3 3.36,17.72 v1(3.29,17.72)
  TOP w0.3: UD1.E1 v1(31.78,25.16)
  TOP w0.305: CD14.2 44.12,14.31 v1(44.33,14.1) ; UD2.H1 34.58,5.88 34.56,5.85 v1(34.58,5.85) ; UD1.D8 v1(31.78,30.76) 31.99,30.55 UD1.E8 ; UD1.H9 34.58,31.74 v1(34.56,31.77) ; v1(33.38,30.76) UD1.G8 ; UD2.K9 36.68,13.38 36.68,13.46 v1(36.72,13.46) ; UD2.F1 32.98,6.08 33.04,6.02 v1(33.04,5.83) ; v1(31.75,11.64) 31.75,11.71 UD2.D8 ; v1(35.78,6.07) UD2.K1 36.22,6.48 ; 37.64,23.93 37.66,23.95 37.7,23.95 37.87,24.11 38.96,24.11 ; 37.64,23.93 37.3,23.59 36.95,23.59 ; 37.64,23.93 v1(37.6,23.93) ; 28.74,30.36 UD1.A8 ; UD2.E1 v1(31.76,6.9) ; v1(30.97,31.63) 30.68,31.34
  L3 w0.076: 35.57,12.16 35.59,12.14 35.85,12.14 36.06,12.35 36.06,12.69 35.71,13.04 ; 40.78,12.74 40.55,12.97 40.55,13.69 40.6,13.73 ; 35.24,9.02 35.38,8.88 ; 35.22,24.31 35.06,24.15 35.06,23.7 35.07,23.69
  L3 w0.089: 35.17,9.75 35.17,10.29 35.2,10.31
  L3 w0.1: 46.63,9.06 46.95,9.38 v1(47.27,9.38) 47.27,9.95 v1(47.79,10.47) ; 44.16,9.52 44.32,9.68 44.32,10.4 v1(44.59,10.68) ; v1(47.99,15.73) 47.83,15.89 v1(47.83,17.77) ; 45.56,10.51 45.56,10.42 45.32,10.19 45.23,10.1 45.23,9.68 45.09,9.53 45.09,9.02 45.18,8.92 45.18,8.88 ; 41.57,10.01 41.57,9.68 41.42,9.52 ; 41.42,26.77 41.42,27.81 41.59,27.98 41.59,28.42 41.57,28.44 ; 43.26,9.52 43.35,9.62 43.35,9.63 43.4,9.68 43.4,10.75 43.46,10.81 ; 45.99,9.52 46.15,9.68 46.15,10.09 46.15,10.1
  L3 w0.102: 41.57,28.44 41.6,28.47 42.28,28.47 42.49,28.26 42.49,27.96 42.33,27.8 42.33,27.05 42.5,26.87 v1(42.59,26.87) 42.75,26.71 42.75,25.97 42.76,25.96 42.76,25.95 43.3,25.4 ; 43.19,8.88 43.25,8.94 v1(43.29,8.94) ; v1(47.99,15.73) 47.94,15.69 v1(47.94,14.59) v1(47.94,13.14) v1(47.94,12.19) v1(47.94,11.36) 47.92,11.33 47.92,10.75 47.79,10.62 v1(47.79,10.47) ; 42.53,10.58 42.53,10.94 42.93,11.33 42.93,11.81 43.57,12.44 v1(43.57,12.61) 43.55,12.62 43.55,13.09 43.46,13.18 43.46,15.99 43.08,16.37 43.08,18.52 43.22,18.67 43.22,19.43 v1(43.03,19.63) 43.13,19.72 43.13,20.41 v1(43.23,20.52) v1(43.23,21.71) 43.23,21.72 43.23,23.65 ; 41.57,10.01 41.58,10.01 41.58,10.08 41.65,10.16 41.65,11.34 v1(41.85,11.54) 41.85,11.78 42.01,11.95 42.67,12.61 42.67,15.08 42.28,15.47 42.28,17.72 v1(42.13,17.87) 42.16,17.9 42.16,18.73 42.31,18.88 42.31,19.17 42.16,19.32 42.16,20.6 v1(42.19,20.63) 42.34,20.78 42.34,22.62 42.17,22.79 42.17,24.84 42.38,25.05 42.38,25.27 41.88,25.78 v1(41.88,26.06) 41.88,26.3 41.42,26.77 ; v1(35.92,28.63) 35.99,28.56 ; 35.99,28.56 36.09,28.46 36.09,27.96 35.93,27.8 35.93,27.15 36.24,26.84 36.24,24.62 36.5,24.36 36.5,23.65 36.76,23.39 ; 35.99,28.56 36.6,28.56 v1(36.71,28.67) ; 37.74,22.65 v1(37.74,22.65) ; 37.74,22.65 37.69,22.6 37.69,18.88 37.5,18.69 37.5,18.23 ; 37.74,22.65 37.74,22.66 37.74,23.94 37.62,24.06 37.56,24.06 ; 35.43,24.38 35.43,24.38 35.17,24.64 35.17,27.35 35.02,27.51 35.02,27.81 35.23,28.02 35.23,28.33 v1(35.4,28.5) 35.1,28.79 34.32,28.79 34.01,28.48 33.98,28.48 33.83,28.34 33.83,28.16 33.8,28.13 33.83,28.09 33.83,27.64 v1(33.88,27.59) 33.88,27.54 34.47,26.96 34.47,26.12 34.49,26.1 34.49,25.8 34.27,25.58 v1(34.25,23.42) v1(34.27,22.6) 34.22,22.48 34.48,21.85 34.48,17.8 v1(34.16,17.49) 34.04,17.37 34.04,13.83 v1(34.23,13.65) 34.05,13.47 34.05,10.23 v1(33.71,9.9) ; 35.43,24.38 35.37,24.31 35.22,24.31 ; 35.43,24.38 35.43,24.36 35.51,24.28 35.55,24.28 35.76,24.07 35.76,23.74 35.46,23.44 35.28,23.44 35.27,23.43 35.27,23.28 v1(35.41,23.14) ; 43.08,8.88 42.84,8.63 42.84,8.54 42.8,8.5 ; 43.08,8.88 43.26,9.05 43.26,9.52 ; 43.08,8.88 42,8.88 ; 37.5,18.23 37.52,18.21 37.52,18.2 37.73,17.99 37.79,17.99 38.1,17.68 38.1,17.38 37.93,17.21 37.93,16.16 ; 37.5,18.23 37.5,18.09 37.39,17.98 37.39,16.7 37.93,16.16 ; 41.42,9.52 41.42,9.29 41.18,9.06 41.18,8.88 ; 36.82,28.56 36.78,28.61 ; 36.82,28.56 38.88,28.56 ; 36.82,28.56 37.02,28.36 37.02,27.98 36.85,27.8 36.85,27.24 36.97,27.11 36.97,24.91 37.56,24.32 37.56,24.06 ; 43.23,23.65 43.61,24.03 43.61,25.1 43.3,25.4 ; 43.23,23.65 42.99,23.88 42.99,23.88 42.89,23.98 42.89,24.31 43.3,24.72 43.3,24.74 43.3,24.74 43.3,25.4 43.3,25.4 ; 42,8.88 42.34,9.22 42.34,9.52 42.49,9.67 42.49,10.54 ; 42,8.88 41.18,8.88 ; 40.24,8.88 39.43,8.88 ; 40.24,8.88 41.18,8.88 ; 40.24,8.88 40.51,9.15 40.51,9.53 40.66,9.68 40.66,10.14 40.91,10.39 40.91,11.85 41.96,12.9 41.96,14.4 41.57,14.79 41.57,15.56 41.4,15.73 v1(41.4,16.33) 41.31,16.42 41.31,16.85 41.24,16.92 41.24,17.79 v1(41.17,17.85) 41.25,17.93 41.25,18.52 41.4,18.67 41.4,19.17 41.32,19.24 41.32,21.93 v1(41.43,22.03) 41.44,22.05 41.44,25.19 41.02,25.61 41.02,26.15 40.5,26.67 40.5,27.8 40.66,27.96 40.66,28.59 40.64,28.61 ; 39.43,8.88 39.51,8.95 39.51,9.43 39.75,9.67 39.75,10.44 v1(39.88,10.58) 40.12,10.82 40.12,12.08 41.25,13.22 41.25,13.73 41.06,13.93 41,13.93 40.9,14.03 v1(40.9,14.04) 40.77,14.17 40.77,14.78 40.51,15.04 40.51,17.3 40.41,17.4 40.41,18.15 40.33,18.23 40.33,18.63 40.47,18.77 40.47,19.97 40.45,20 40.45,20.17 ; 39.43,8.88 39.04,8.88 38.68,9.23 38.68,9.52 38.83,9.67 38.83,10.78 39.4,11.35 39.4,12.39 39.82,12.8 39.82,13.89 v1(39.69,14.01) 39.79,14.11 ; 38.79,24.19 38.79,25.28 38.25,25.82 ; 38.79,24.19 38.79,22.54 38.77,22.52 ; 38.79,24.19 38.74,24.19 37.91,25.01 37.91,25.46 38.25,25.8 38.25,25.82 ; v1(35.62,22.64) 35.5,22.52 35.5,17.89 v1(35.7,17.69) 35.75,17.64 35.75,13.84 v1(35.52,13.61) ; v1(47.79,20.5) 47.79,19.56 47.82,19.54 v1(47.82,19.54) 47.84,19.52 v1(47.84,18.44) 47.83,18.44 v1(47.83,17.77) ; v1(47.79,20.5) 47.8,20.5 ; v1(47.79,20.5) 47.85,20.55 v1(47.85,21.57) 47.85,23.06 v1(47.91,23.12) 47.7,23.33 47.7,27.58 47.17,28.11 47.17,28.15 46.85,28.47 45.05,28.47 45.04,28.46 45.23,28.26 45.23,27.96 45.08,27.8 45.08,27.34 45.93,26.48 45.93,25.9 46.12,25.71 ; 36.76,23.39 36.79,23.36 36.79,22.75 36.77,22.73 36.77,19.18 36.77,19.17 36.77,18.88 36.77,18.68 36.59,18.49 36.59,18.2 36.64,18.15 36.64,15.32 v1(36.98,14.98) 36.76,14.76 36.76,13.5 v1(36.72,13.46) 36.94,13.23 36.94,12.19 36.09,11.34 36.09,9.68 35.94,9.53 35.94,9.19 v1(36.27,8.86) ; 36.76,23.39 36.66,23.29 v1(36.66,23.07) ; 40.45,20.17 40.45,22.49 v1(40.57,22.61) v1(40.57,24.37) 40.31,24.63 40.31,25.83 39.73,26.41 39.73,27.37 39.59,27.51 39.59,27.8 39.73,27.94 39.73,27.95 39.75,27.97 39.75,28.26 39.65,28.35 39.65,28.43 v1(39.83,28.61) ; 40.45,20.17 v1(40.43,20.17) ; 46.19,28 46.1,27.91 46.1,27.91 45.99,27.8 45.99,27.51 46.82,26.68 v1(46.82,26.46) 46.96,26.32 46.96,23.14 v1(46.78,22.96) v1(46.78,21.54) 46.84,21.48 46.84,20.18 46.72,20.06 v1(46.72,19.85) 46.72,19.66 46.88,19.5 46.88,18.85 46.74,18.72 46.74,16.69 v1(46.87,16.57) 46.84,16.55 46.84,15.2 v1(46.83,15.19) 46.94,15.08 46.94,14.86 46.94,14.86 46.94,14.15 46.94,14.14 46.94,12.43 v1(46.87,12.37) 46.94,12.3 46.94,10.89 46.15,10.1 ; 37.93,16.16 v1(38.05,16.04) 37.88,15.87 37.88,13.5 v1(37.82,13.44) 37.91,13.35 37.91,12.09 37,11.18 37,9.67 36.86,9.52 36.86,9.43 36.28,8.86 v1(36.27,8.86) ; v1(36.27,8.86) 35.4,8.86 35.38,8.88 ; 35.19,11.79 35.19,10.32 35.2,10.31 v1(35.2,10.31) ; 35.19,11.79 35.39,11.99 35.39,13.48 v1(35.52,13.61) ; 35.19,11.79 35.57,12.16 ; 38.77,22.52 38.77,22.64 v1(38.78,22.66) ; 38.77,22.52 38.77,22.17 38.49,21.9 38.49,19.3 38.63,19.17 38.63,18.74 38.46,18.57 38.46,18.28 38.74,18 38.74,17.43 38.91,17.25 38.91,14.46 38.83,14.37 38.83,13.39 v1(38.96,13.27) 38.96,13.04 38.67,12.75 38.67,11.78 37.92,11.03 37.92,9.68 37.68,9.44 v1(37.68,9.04) ; 38.25,25.82 38.25,26.96 37.76,27.45 37.76,27.8 38.06,28.1 38.06,28.48 38.19,28.61 ; 35.24,9.02 35.03,9.23 35.03,9.6 35.17,9.75 ; 45.99,9.52 45.99,9.16 45.7,8.88 ; v1(35.52,13.61) 35.71,13.42 35.71,13.04 ; 46.45,8.88 46.63,9.06 ; 43.49,26.55 43.46,26.58 43.46,27.25 43.42,27.29 43.25,27.46 43.25,27.8 43.51,28.07 43.51,28.17 43.87,28.52 44.3,28.52 44.3,28.28 44.32,28.26 44.32,27.97 44.24,27.89 44.24,27.88 44.16,27.8 44.16,27.55 44.17,27.54 44.17,27.16 45.13,26.2 45.13,25.02 v1(45.23,24.93) 45.2,24.9 45.2,21.72 v1(45.02,21.54) 45.02,19.21 45.05,19.17 45.05,18.67 44.91,18.52 44.91,17.92 v1(44.85,17.86) 44.93,17.78 44.93,15.6 v1(45.05,15.47) 45.2,15.33 45.2,11.28 v1(44.59,10.68) ; v1(37.6,23.93) 37.59,23.94 37.59,24.03 37.56,24.06 ; v1(44.84,8.88) 44.52,8.88 44.16,9.24 44.16,9.52 ; 45.56,10.51 46.08,11.03 v1(46.08,11.58) 45.94,11.71 45.94,13.04 v1(46.06,13.16) 46.06,14.49 v1(46.08,14.5) 45.93,14.65 45.93,16.2 v1(45.84,16.28) 45.84,17.76 v1(45.83,17.77) 45.82,17.78 45.82,18.52 45.97,18.67 45.97,19.24 45.81,19.4 45.81,19.4 45.77,19.43 45.77,20.57 v1(45.95,20.75) 45.92,20.78 45.92,23.76 v1(46.07,23.91) 46.14,23.98 46.14,25.43 ; 43.46,10.81 43.46,10.81 43.82,11.17 43.82,11.38 v1(44.14,11.7) 44.48,12.04 44.48,13.95 v1(44.33,14.1) 44.17,14.26 44.17,17.21 43.99,17.39 43.99,18.52 44.14,18.67 44.14,19.42 v1(44.03,19.52) 44.03,19.71 44.14,19.82 44.14,22.11 44.27,22.24 v1(44.27,22.46) 44.27,23.25 44.33,23.31 44.33,25.66 v1(43.78,26.21) ; v1(39.41,20.86) 39.66,21.1 39.66,23.68 39.55,23.78 39.55,25.57 39,26.12 39,27.18 38.68,27.51 38.68,27.8 38.94,28.07 38.94,28.5
  L3 w0.114: v1(39.41,20.86) 39.4,20.86 39.4,20.85 39.31,20.76 39.31,19.65 v1(39.36,19.61) 39.55,19.41 39.55,18.72 39.43,18.61 39.43,17.78 39.75,17.46 39.75,14.72 39.79,14.69 39.79,14.11
  L3 w0.254: v1(17.85,22.37) 17.85,23.12 v1(20.66,25.93) 20.67,25.93 v1(21.7,26.96) 21.7,26.97 v1(23.56,28.83) 23.56,28.84 v1(24.86,30.14) 26.05,31.33 v1(26.1,31.33) 27.55,32.78 v1(29.39,32.78) 29.49,32.78 30.15,33.44 32.45,33.44 32.66,33.66 33.61,33.66 v1(33.66,33.61) 33.83,33.78 39.6,33.78 v1(40.1,33.28) 40.45,33.63 v1(43.63,33.63) 43.69,33.57 47.67,33.57 v1(47.74,33.49) 47.97,33.72 49.18,33.72 v1(49.26,33.81) 50.1,33.81 v1(50.45,33.45) ; v1(35.41,23.14) 35.41,22.85 v1(35.62,22.64) ; v1(37.16,1.52) 36.99,1.35 33.18,1.35 33,1.54 v1(31.06,1.54) 29.99,1.54 v1(29.06,2.47) 28.8,2.47 26.43,4.85 v1(26.43,5.04) 26.22,5.04 24.38,6.89 v1(24.38,7.08) 24.19,7.08 23.52,7.74 v1(23.52,7.94) 23.34,7.94 22.41,8.87 v1(22.41,9.05) 22.19,9.05 21.32,9.93 v1(21.32,10.15) 21.05,10.15 20.14,11.06 20.14,11.37 v1(20.09,11.42) 19.95,11.42 18.88,12.49 18.88,12.6 v1(18.8,12.67) 18.76,12.67 17.95,13.48 17.95,14.58 17.45,15.08 17.45,15.56 v1(17.49,15.61) ; v1(36.71,28.67) 36.78,28.61 36.88,28.71 38.08,28.71 38.19,28.61 v1(39.83,28.61) 40.64,28.61
  BOTTOM w0.076: 41.34,27.74 41.64,28.03 ; 45.92,27.73 46.21,28.02 ; 35.84,9.45 36.14,9.74 ; 39.82,28.07 39.82,28.03 39.54,27.74 39.54,27.72 ; 45.01,27.74 45.31,28.04 ; 38.88,28.02 38.6,27.73 38.6,27.69 ; v1(35.7,17.69) 35.57,17.83 34.5,17.83 v1(34.16,17.49) ; 44.05,27.71 44.34,28 ; 42.24,27.71 42.53,28.01 ; 40.45,27.71 40.45,27.74 40.75,28.03 ; 43.16,27.72 43.46,28.01 ; 39.52,9.45 39.81,9.74 ; 36.76,9.44 37.05,9.73
  BOTTOM w0.102: v1(33.04,5.83) 33.04,5.52 32.43,4.91 v1(32.38,4.91) ; 35.2,10.31 v1(35.2,10.31) ; 35.2,10.31 35.13,10.38 34.19,10.38 v1(33.71,9.9) 34.06,9.55 35,9.55 35.21,9.76 35.21,9.82 35.23,9.83 35.23,10.28 35.2,10.31 ; v1(22.12,16.81) 23.41,16.81 v1(23.44,16.79) 23.74,16.48 31.22,16.48 v1(31.35,16.61) 31.88,16.07 37.52,16.07 37.55,16.04 v1(38.05,16.04) 38.23,16.22 39.55,16.22 v1(41.17,17.85) ; v1(34.16,17.49) 34.57,17.08 35.28,17.08 35.7,17.51 v1(35.7,17.69) 36.91,17.69 37.13,17.91 37.92,17.91 38.48,18.48 38.48,18.56 38.68,18.76 38.95,18.76 39.02,18.69 39.32,18.69 39.52,18.89 39.52,19.45 v1(39.36,19.61) ; 31.85,26.19 31.85,25.23 v1(31.78,25.16) 31.54,24.93 v1(31.54,23.86) 31.52,23.83 31.52,23.62 31.72,23.42 32.68,23.42 32.97,23.72 32.97,24.24 v1(32.91,24.3) 32.76,24.45 32.76,26.02 32.83,26.09 33.17,26.09 33.55,26.48 33.55,26.81 33.73,26.99 33.73,27.18 33.88,27.33 v1(33.88,27.59) 33.06,27.59 v1(32.94,27.47) 32.75,27.47 32.43,27.15 32.43,26.77 31.85,26.19
  BOTTOM w0.254: 18.01,13.87 18.01,14.41 16.36,16.06 v1(16.36,16.69) 16.36,16.74 16.47,16.74 v1(17.12,17.39) 17.8,18.06 v1(17.8,18.13) 17.9,18.13 v1(18.19,18.42) ; CD6.2 26.34,23.09 ; v1(40.43,20.17) 39.74,20.86 v1(39.41,20.86) 39.4,20.85 39.3,20.95 35.3,20.95 34.82,20.48 29.57,20.48 v1(29.51,20.42) ; 31.09,18.74 v1(31.09,18.7) 31.21,18.82 34.91,18.82 36.05,19.96 38.64,19.96 38.99,19.61 v1(39.36,19.61) ; v1(39.83,28.61) 39.71,28.73 RD14.1 ; RD15.1 38.83,10.45 38.84,10.44 39.31,10.44 39.45,10.58 v1(39.88,10.58) ; v1(32.14,8.64) 32.14,8.09 31.71,7.65 31.71,6.95 v1(31.76,6.9) ; v1(29.51,20.42) 29.09,20 24.98,20 24.75,19.76 v1(23.43,19.76) ; v1(29.51,20.42) 29.51,20.46 ; 19.29,24.67 v1(19.29,23.75) 19.04,23.5 RD5.1 ; 30.97,18.82 v1(24.16,18.82) ; v1(43.5,28.51) 43.16,28.85 RD12.1 ; 26.05,22.8 CD7.2
  BOTTOM w0.305: v1(34.25,23.42) 34.3,23.45 34.73,23.45 34.77,23.41 CD15.2
  BOTTOM w0.508: 38.31,33.01 39.22,33.01 CD21.2 39.22,32.32 v1(39.21,32.31) ; 38.31,33.01 38.31,32.73 v1(37.92,32.35) ; 38.31,33.01 36.62,33.01 RD7.1 36.61,32.44 v1(36.72,32.33) ; v1(36.57,6.87) 36.55,6.89
  vias: v1(12.87,17.35) v1(13.58,17.36) v1(17.51,14.19) v1(22.37,21.63) v1(22.49,22.76) v1(24.98,27.84) v1(25.59,15.43) v1(26.41,22.12) v1(28.44,31.39) v1(29.85,10.53) v1(30.43,32.46) v1(30.55,5.01) v1(30.76,0.4) v1(31.15,33.55) v1(31.37,15.03) v1(32.58,31.56) v1(32.74,9.09) v1(32.75,1.39) v1(33.7,0.8) v1(33.79,28.15) v1(34.04,20.91) v1(34.15,8.47) v1(34.66,1.05) v1(35.19,4.05) v1(35.41,1.16) v1(36.58,30.76) v1(37.38,3.32) v1(37.81,1.61) v1(38.98,6.86) v1(39.75,1.59) v1(39.88,31.72) v1(41.13,32.73) v1(41.12,28.62) v1(42.11,31.47) v1(42.07,1.57) v1(42.43,8.66) v1(43.24,16.88) v1(43.28,0.28) v1(44.32,5.79) v1(44.29,1.45) v1(44.92,1.23) v1(44.99,29.32) v1(44.99,2.72) v1(45.41,28.7) v1(45.63,33.62) v1(46.16,7.32) v1(46.28,28.62) v1(46.46,1.07) v1(46.61,29.25) v1(46.96,3.5) v1(47.62,28.11) v1(47.62,9.82) v1(47.87,25.86) v1(47.9,24.71) v1(48.54,1.16) v1(48.98,5.52) v1(49.77,1.29)
SBG1/GND: length 43.5
  TOP w0.102: v1(38.27,19.02) 38.39,18.91 38.39,17.51 37.31,16.43
  TOP w0.114: 37.31,16.43 36.17,15.29 32.22,15.29 32.11,15.39 30.36,15.39 29.93,14.96 25.06,14.96 RD16.2 ; UD2.M9 37.42,12.52 37.42,9.96 v1(37.56,9.82) ; v1(37.64,28.18) 37.64,28.94 37.45,29.13 37.45,30.83 UD1.M9
  L3 w0.102: v1(37.56,9.82) 37.56,10.97 38.46,11.87 38.46,12.85 38.6,12.99 38.6,14.43 38.71,14.54 38.71,17.13 38.52,17.32 38.52,17.93 38.25,18.2 38.25,19 v1(38.27,19.02) 38.25,19.04 38.25,22.07 38.43,22.24 38.43,24.21 37.56,25.08 37.56,28.1 v1(37.64,28.18)
  BOTTOM w0.114: v1(37.64,28.18) 38.06,28.6 RD14.2 ; RD15.2 37.5,9.88 v1(37.56,9.82)
